# Altium PCB DIGITAL COUNTER.PcbDoc
Units mil, origin at the board's own origin, x right, y up, seen from the top; angles counter-clockwise.
Board outline 1260 x 1570 mil, 2 copper layers (Top Layer, Bottom Layer); 10 components, 14 nets, 48 pads, 17 vias.
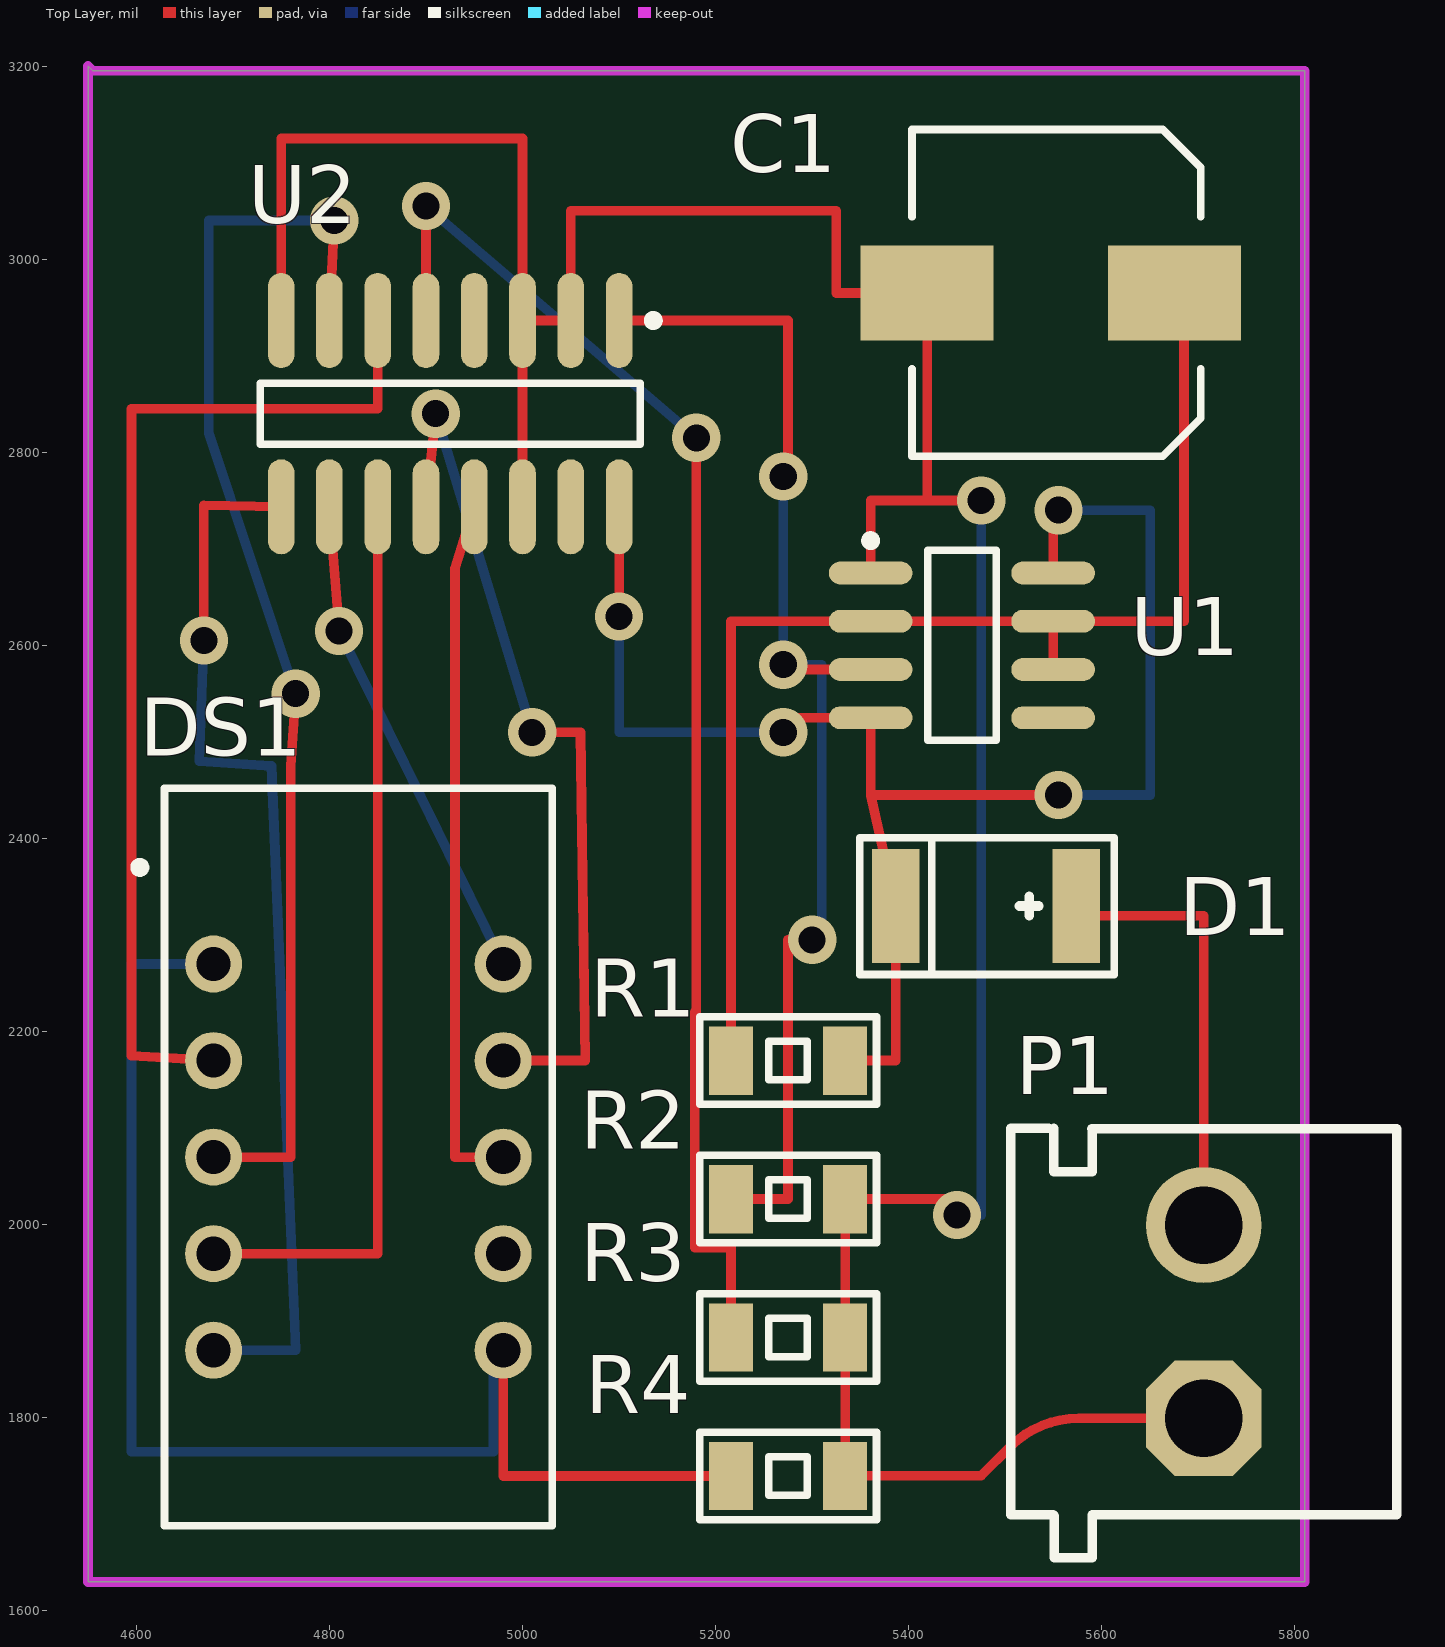
[diagram p0: Top Layer view]
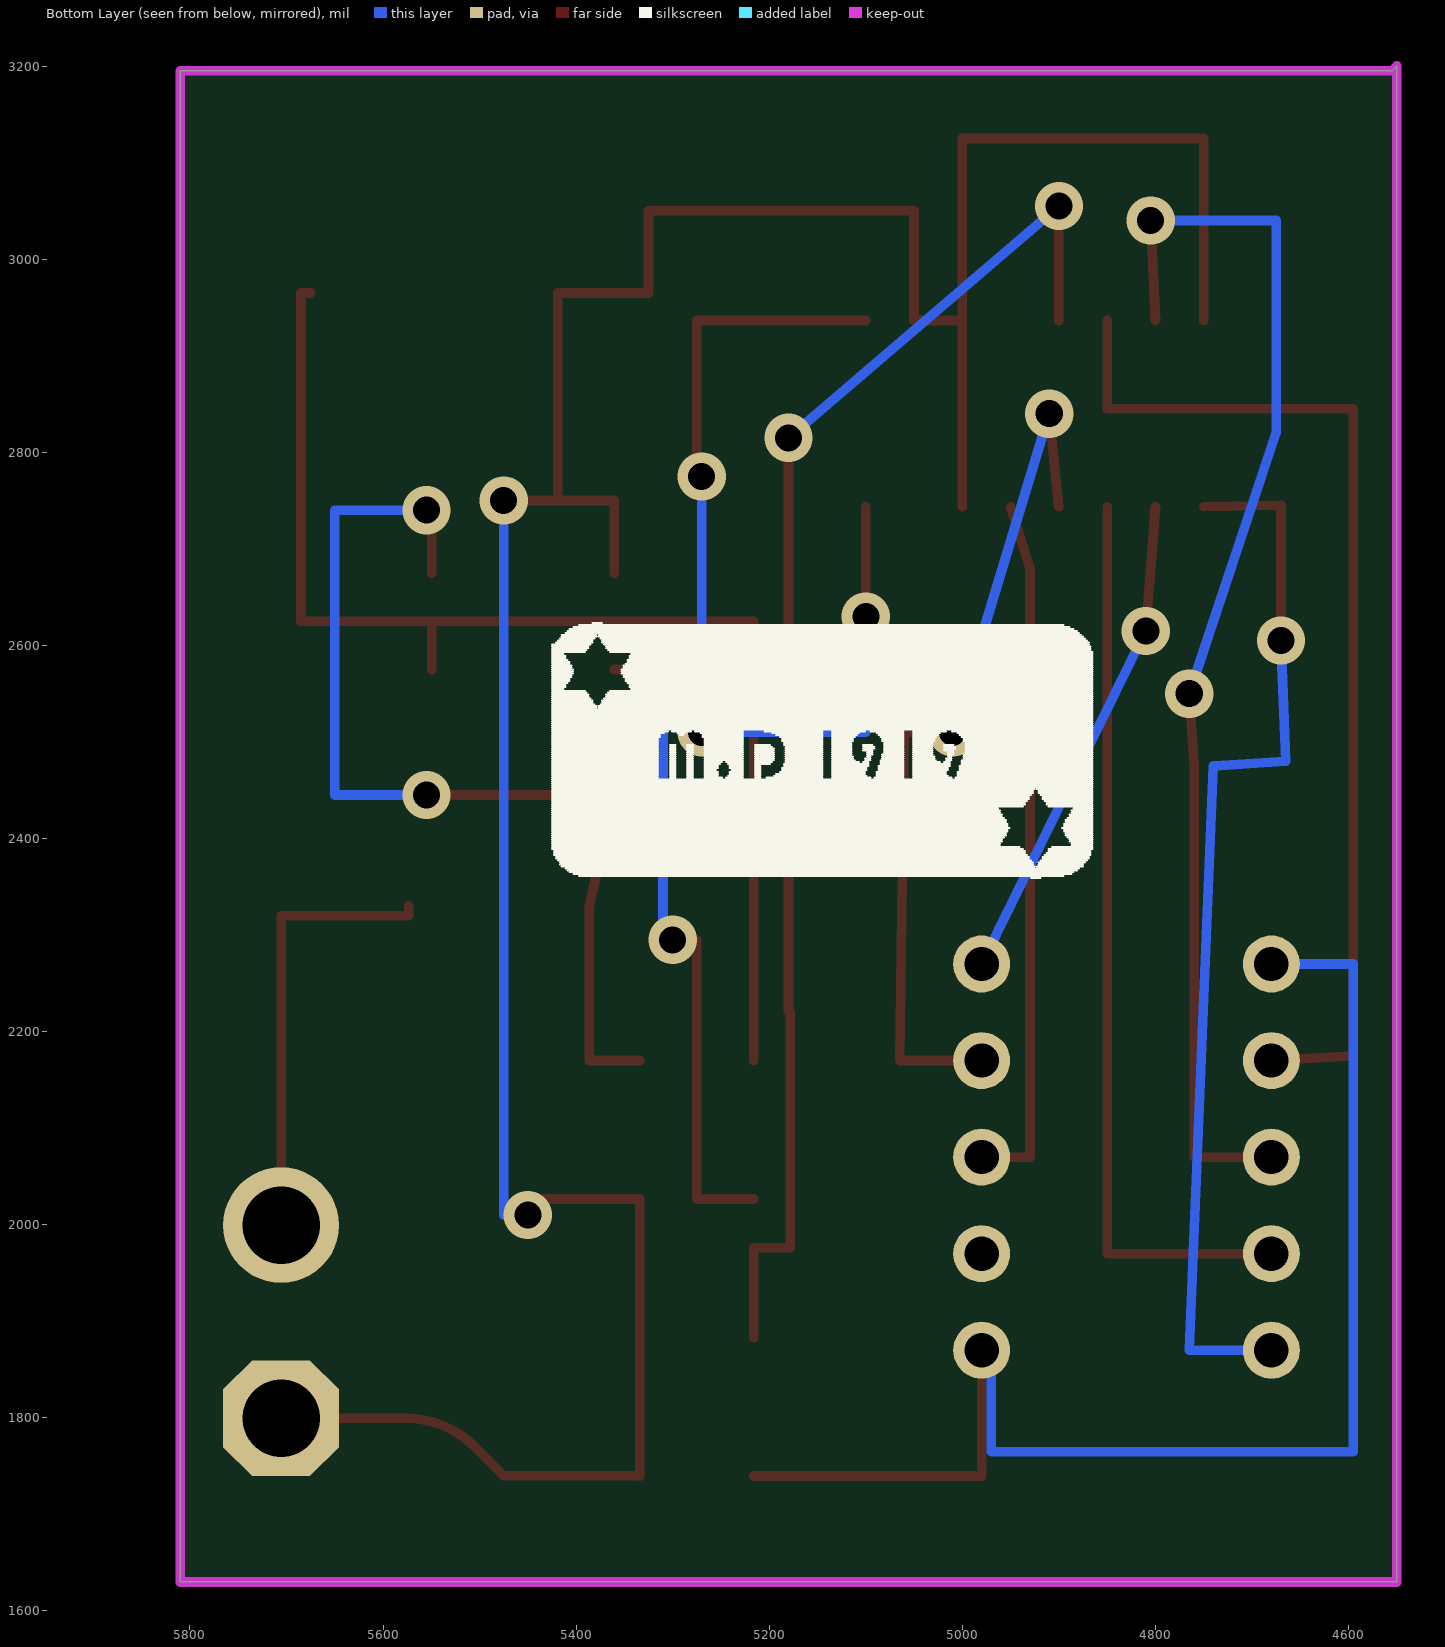
[diagram p1: Bottom Layer view, seen from below]
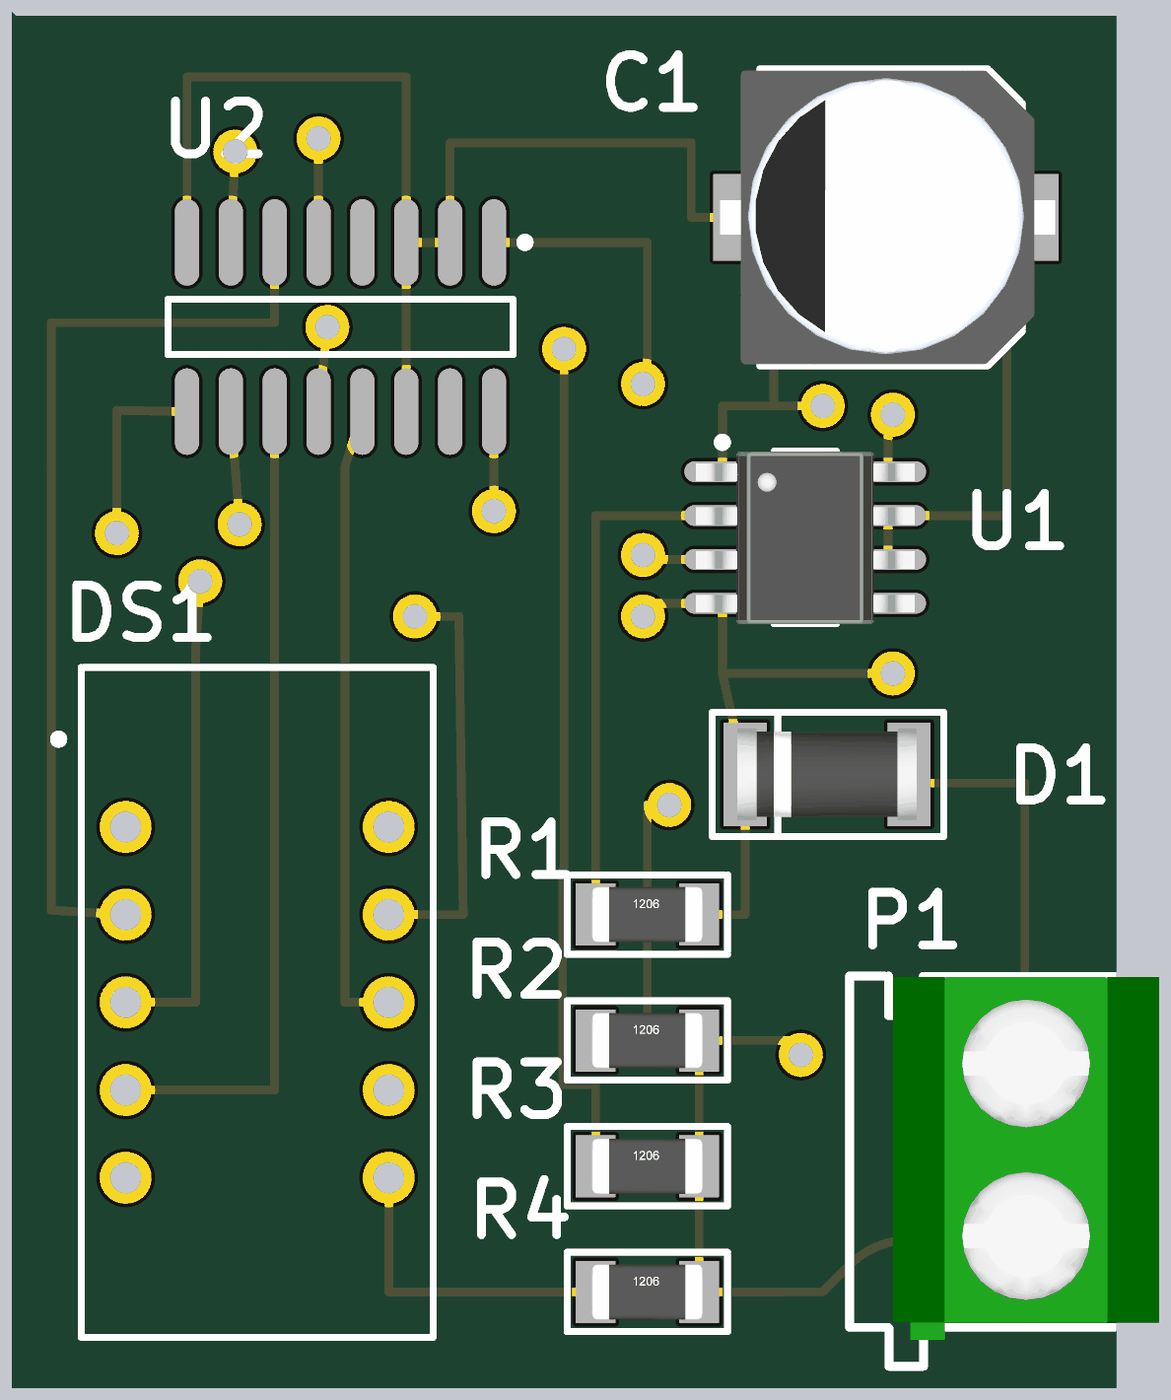
[diagram p2: 3D render of the assembled board from above, using the file's embedded part models]

## Layer stack, top to bottom
Top Layer: signal copper 1.4
Dielectric: dielectric 12.6, FR-4, Dk 4.8
Bottom Layer: signal copper 1.4

## Board outline
4550,1630 4550,3200 4555,3195 5810,3195 5810,1630

## Design rules (kind name [scope] priority, off if disabled: settings)
Clearance [All] p1: gap=10
PolygonConnect [All] p1: connectstyle=Relief reliefconductorwidth=10 reliefentries=4 polygonreliefangle="90 Angle" airgapwidth=10
RoutingVias [All] p1: holewidth=28 width=50 viastyle="Through Hole" minholewidth=28 minwidth=50 maxholewidth=28 maxwidth=50
SolderMaskExpansion [All] p1: expansion=4
Width [All] p1: maxlimit=10 minlimit=10 preferedwidth=10
28 further rules are at their usual default settings.

## Components (designator, comment, footprint, x,y, rotation, side; value= is the part's Value field where it differs from the comment)
C1 "0.01uF" "Cap 0810" 5675,2965 r180 top
D1 "SM4001" DIODE_DO-213AB 5480,2330 r180 top
DS1 "5082-7613" A-10(14) 4830,2070 r0 top
P1 "Terminal 2pin" "Terminal 2pin" 5705,1900 r90 top
R1 "47K" R_1206 5275,2170 r0 top
R2 "220K" R_1206 5275,2026.57 r0 top
R3 "47K" R_1206 5275,1883.15 r0 top
R4 "470R" R_1206 5275,1739.72 r0 top
U1 "NE 555" SO-8 5455,2600 r0 top
U2 "HCC4033BF" SOIC16_M 4925,2840 r270 top

## Footprints (in the part's own frame and the unit in brackets; to place one, negate y for a bottom-side part, rotate by r counter-clockwise, add the part's x,y. Pads: shape width x height; smd on the part's side, far side on the other; paste and mask are expansions set on the pad)
A-10(14) [mm] "LED, 7-Segment Display, 7.62 mm, RHD; 14 Leads (4 Absent); Row Space 7.62 mm; Pitch 2.54 mm"
  round 1.5 hole 0.9: 2(-3.81,5.08) 3(-3.81,2.54) 4(-3.81,0) 5(-3.81,-2.54) 6(-3.81,-5.08) 9(3.81,-5.08) 10(3.81,-2.54) 11(3.81,0) 12(3.81,2.54) 13(3.81,5.08)
  silkscreen extent -5.87,-9.7 5.1,9.7
"Cap 0810" [mm] "Aluminum SMT 8.6x8.6x10mm cap"
  rect 3.5x2.5 smd: 1(0,0) 2(6.5,0)
  silkscreen extent -0.7,-4.3 6.9,4.3, body extent -1.65,-4.25 8.05,4.25, height 10.3
DIODE_DO-213AB [mm]
  rect 1.25x3 smd: 1(-2.375,0) 2(2.375,0)
  silkscreen extent -3.37,-1.8 3.32,1.8, body extent -2.6,-1.34 2.6,1.33, height 2.67
R_1206 [mm]
  rect 1.15x1.8 smd: 1(-1.5,0) 2(1.5,0)
  silkscreen extent -2.32,-1.15 2.33,1.15, body extent -1.6,-0.8 1.6,0.8, height 1
SO-8 [mm] "SOIC, 8-Leads, Body 4.9x3.9mm, Pitch 1.27mm, IPC Medium Density"
  oval 2.2x0.6 smd: 1(-2.4,1.905) 2(-2.4,0.635) 3(-2.4,-0.635) 4(-2.4,-1.905) 5(2.4,-1.905) 6(2.4,-0.635) 7(2.4,0.635) 8(2.4,1.905)
  silkscreen extent -2.52,-2.5 0.9,2.88, body extent -3.17,-2.51 3.17,2.49, height 1.88
SOIC16_M [mm] "SOIC, 16-Leads, Body 9.9x3.9mm, Pitch 1.27mm, IPC Low Density"
  oval 2.5x0.7 smd: 1(-2.45,4.445) 2(-2.45,3.175) 3(-2.45,1.905) 4(-2.45,0.635) 5(-2.45,-0.635) 6(-2.45,-1.905) 7(-2.45,-3.175) 8(-2.45,-4.445) 9(2.45,-4.445) 10(2.45,-3.175) 11(2.45,-1.905) 12(2.45,-0.635) 13(2.45,0.635) 14(2.45,1.905) 15(2.45,3.175) 16(2.45,4.445)
  silkscreen extent -2.57,-5 0.8,5.47, body extent -2,-5 2,5, height 1.91
"Terminal 2pin" [mil]
  oct 120x120 hole 80: 1(-100.5,-0.5)
  round 120 hole 80: 2(99.5,-0.5)
  silkscreen extent -245,-200 200,200, body extent -215,-154 199,150, height 413

## Part data
C1: library part "Cap 220uF"
D1: library part D_DO-213, "Diode"
DS1: "7.62 mm HER 7-Segment Display: CC, RH DP"
R1 R2 R3 R4: library part RES
U1: library part XC17S05VO8C, "XC17S00 Series, One-Time Programmable Configuration 5V PROM, 8-Pin TSOP, XCS05 Compatible, Commercial Grade"
U2: "Decade Counter / Divider with Decoded 7-Segment Display Output"

## Via types
v1: diameter 50, hole 28, Top Layer to Bottom Layer, 17 vias

## Nets (pads, with @x,y where several pads share a name; then routed paths per layer and width w, separated by ;. In a path a pad name is that pad's centre, name@x,y a point inside that pad or via, vN(x,y) a via of type N, cw(c..) or ccw(c..) an arc to the next point about the centre after c; other vN are vias at no path point)
+5: D1.1 P1.2 | length 462.5
  Top Layer w10: D1.1 5573.5,2320 5705.5,2320 P1.2
GND: C1.2 P1.1 R2.2 R3.2 R4.2 U1.1 U2.2 U2.3 U2.8 U2.14 | length 3426.1
  Top Layer w10: U2.8 4750,3125 5000,3125 U2.3 ; U2.14 U2.3 ; U1.1 5360.51,2750 5419.09,2750 ; v1(5450,2010) 5450,2026.57 R2.2 R3.2 R4.2 5475,1740 5505.21,1770.21 cw(c5575.92,1699.5) 5575.92,1799.5 P1.1 P1.1@5700,1794 ; v1(5475,2750) 5419.09,2750 ; U2.3 U2.2 5050,3050 5325,3050 5325,2965 C1.2 5419.09,2750
  Bottom Layer w10: v1(5450,2010) 5475,2010 v1(5475,2750)
N1: C1.1 R1.1 U1.2 U1.6 U1.7 | length 1324.1
  Top Layer w10: R1.1 5215.94,2625 U1.2 U1.7 ; U1.6 U1.7 ; C1.1 5685,2965 5685,2625 U1.7
NetD1_2: D1.2 R1.2 U1.4 U1.8 U2.16 | length 1669.4
  Top Layer w10: v1(5100,2630) U2.16 ; v1(5270,2510) 5270,2525 U1.4 5360.51,2445 ; R1.2 5386.5,2170 D1.2 5360.51,2445 ; U1.8 5549.49,2740 v1(5555,2740) ; v1(5555,2445) 5360.51,2445
  Bottom Layer w10: v1(5100,2630) 5100,2510 v1(5270,2510) ; v1(5555,2445) 5650,2445 5650,2740 v1(5555,2740)
NetDS1_2: DS1.2 DS1.9 R4.1 | length 1446.2
  Top Layer w10: DS1.9 4980,1739.72 R4.1
  Bottom Layer w10: DS1.2 4595,2270 4595,1765 4970,1765 4970,1870 DS1.9
NetDS1_3: DS1.3 U2.6 | length 1101.6
  Top Layer w10: DS1.3 4595,2175 4595,2845 4850,2845 U2.6
NetDS1_4: DS1.4 U2.7 | length 1298.4
  Top Layer w10: DS1.4 4760,2070 4760,2475 v1(4765,2550) ; U2.7 v1(4805,3040)
  Bottom Layer w10: v1(4765,2550) 4675,2820 4675,3040 v1(4805,3040)
NetDS1_5: DS1.5 U2.11 | length 943.5
  Top Layer w10: DS1.5 4850,1970 U2.11
NetDS1_6: DS1.6 U2.9 | length 1110.8
  Top Layer w10: v1(4670,2605) 4670,2745 U2.9
  Bottom Layer w10: v1(4670,2605) 4665,2480 4740,2475 4765,1870 DS1.6
NetDS1_11: DS1.11 U2.13 | length 726.6
  Top Layer w10: U2.13 4930,2680 4930,2070 DS1.11
NetDS1_12: DS1.12 U2.12 | length 916.8
  Top Layer w10: U2.12 v1(4910,2840) ; DS1.12 5065,2170 5060,2510 v1(5010,2510)
  Bottom Layer w10: v1(4910,2840) v1(5010,2510)
NetDS1_13: DS1.13 U2.10 | length 513.5
  Top Layer w10: U2.10 v1(4810,2615)
  Bottom Layer w10: v1(4810,2615) DS1.13
NetR2_1: R2.1 U1.3 U2.1 | length 1319.4
  Top Layer w10: U2.1 5275,2936.46 5275,2775 v1(5270,2775) ; R2.1 5275,2026.57 5275,2295 v1(5300,2295) ; v1(5270,2580) 5270,2575 U1.3
  Bottom Layer w10: v1(5270,2775) v1(5270,2580) 5310,2580 5310,2295 v1(5300,2295)
NetR3_1: R3.1 U2.5 | length 1458.5
  Top Layer w10: U2.5 v1(4900,3055) ; v1(5180,2815) 5180,2220.43 5178.31,2220.43 5178.31,1976.14 5215.94,1976.14 R3.1
  Bottom Layer w10: v1(4900,3055) v1(5180,2815)
pads on no net: DS1.10 U1.5 U2.4 U2.15

## Keep-outs
Keep-Out Layer:
  the board outline again, w10

## Silkscreen, mask and mechanical layers (free items; w line width, h text height)
Bottom Overlay:
  drawing of 449 lines, arcs and shapes, not listed